# Altium PCB menb_HV_v1.0 - Cu.PcbDoc (part 2 of 3)
Units mil, origin at the board's own origin, x right, y up, seen from the top; angles counter-clockwise.
Board outline 6102.36 x 4921.26 mil, 2 copper layers (Top Layer, Bottom Layer); 139 components, 224 nets, 601 pads, 106 vias.
Unrouted connection lines stored in the file: 1.
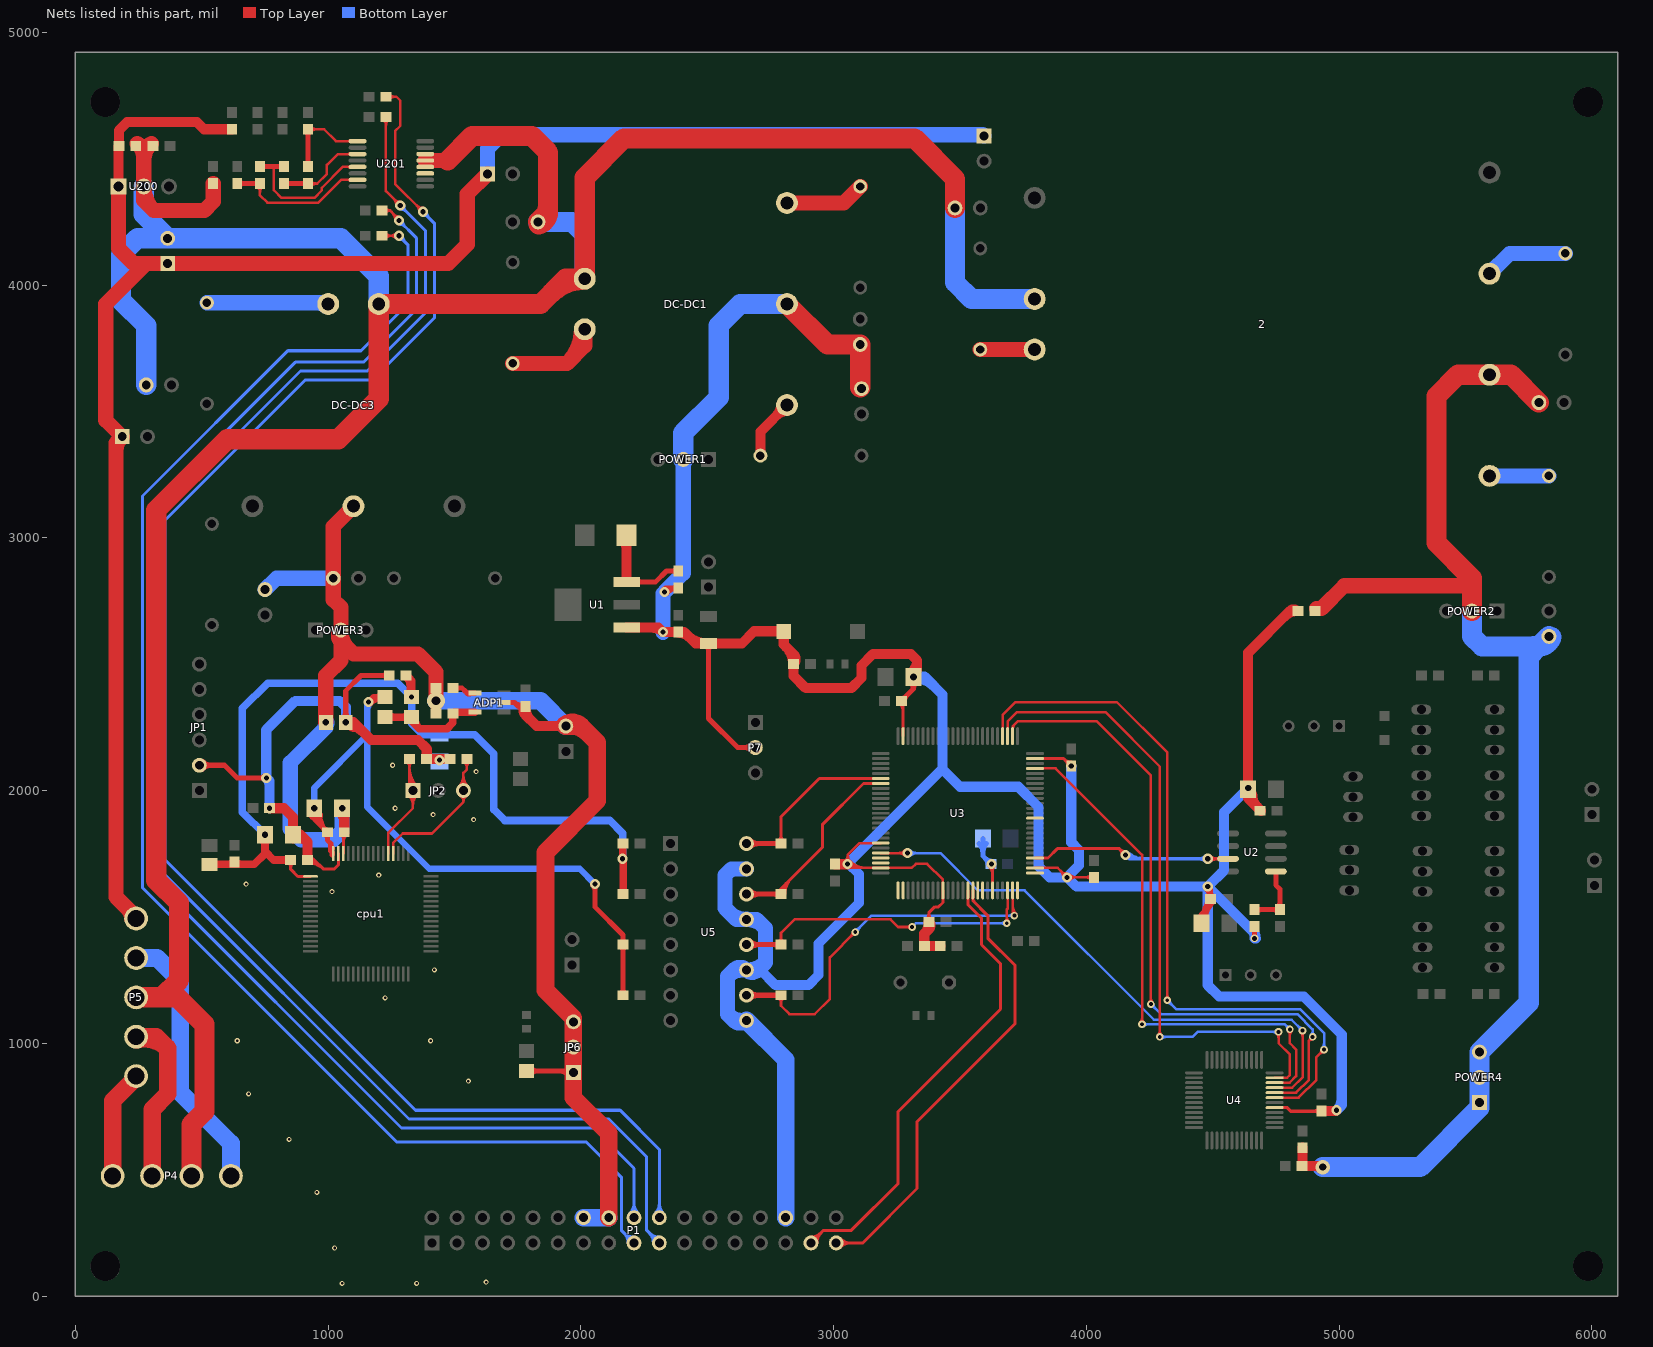
[diagram p2: the nets of this part, all layers, seen from the top]

## Via types
v1: diameter 40, hole 20, Top Layer to Bottom Layer, tented both sides, 48 vias
v2: diameter 20, hole 10, Top Layer to Bottom Layer, tented both sides, 20 vias
v3: diameter 30, hole 15, Top Layer to Bottom Layer, tented both sides, 20 vias
v4: diameter 50, hole 25, Top Layer to Bottom Layer, 5 vias
v5: diameter 50, hole 25, Top Layer to Bottom Layer, tented both sides, 4 vias
v6: diameter 40, hole 20, Top Layer to Bottom Layer, 2 vias
v7: diameter 50, hole 28, Top Layer to Bottom Layer, 1 vias
v8: diameter 30, hole 20, Top Layer to Bottom Layer, tented both sides, 1 vias
v9: diameter 31, hole 15, Top Layer to Bottom Layer, tented both sides, 1 vias
v10: diameter 70, hole 35, Top Layer to Bottom Layer, tented both sides, 1 vias
v11: diameter 60, hole 30, Top Layer to Bottom Layer, tented both sides, 1 vias
v12: diameter 58, hole 28, Top Layer to Bottom Layer, 1 vias
v13: diameter 60, hole 30, Top Layer to Bottom Layer, 1 vias

## Nets (pads, with @x,y where several pads share a name; then routed paths per layer and width w, separated by ;. In a path a pad name is that pad's centre, name@x,y a point inside that pad or via, vN(x,y) a via of type N, cw(c..) or ccw(c..) an arc to the next point about the centre after c; other vN are vias at no path point) (continued)
A3V3: C12.2 C13.2 cpu1.64 R3.1 R8.1 R19.1 | length 3492.1
  Top Layer w20: C12.2@926.52,1928.36 ccw(c968.94,1923.05) 938.71,1892.82 ; C12.2@929.14,1909.38 cw(c952.93,1912.66) C12.2@943.06,1934.56 ; C12.2@933.24,1907.99 cw(c919.51,1886.66) 944.88,1886.66 ; C12.2@934.51,1919.39 cw(c909.48,1894.36) 944.88,1894.36 ; C12.2@936.06,1918.04 cw(c912.82,1887.34) 950.96,1892.61 ; 944.88,1893.22 cw(c981.9,1893.22) C12.2@955.72,1919.39 ; C12.2@944.88,1930 944.88,1886.65 ; C12.2@946.37,1925.88 ccw(c1020.33,1916.62) 967.62,1863.91 ; C12.2@948.14,1933.99 cw(c914.22,1889.2) C12.2@969.87,1896.89 ; C12.2@950.52,1895.83 cw(c984.12,1900.47) C12.2@957.08,1920.94 ; C12.2@956.52,1907.99 ccw(c970.26,1886.66) 944.88,1886.66 ; C12.2@966.21,1923.39 ccw(c1071.72,1910.19) C13.2@996.54,1835 ; 976.64,1854.89 cw(c956.75,1835) C13.2@984.88,1835 ; C13.2@981.39,1850.14 ccw(c994.57,1863.31) C13.2@994.57,1844.68 ; C13.2@989.69,1828.15 cw(c973.15,1811.62) 996.54,1811.62 cw(c1019.92,1811.62) C13.2@1003.38,1828.15 ; 1015,1745 1015,1756.1 1010,1761.1 1010,1790 996.54,1803.46 C13.2@996.54,1835 ; 1015,1749.41 cw(c1021.69,1749.41) cpu1.64@1016.96,1754.14 ; 1015,1751.69 ccw(c1021.69,1751.69) cpu1.64@1016.96,1746.96 ; v1@2047.93,1622.93 cw(c2030.86,1605.86) 2055,1605.86 cw(c2079.14,1605.86) v1@2062.07,1622.93 ; v1(2055,1630) 2055,1540 2166.54,1428.46 R8.1@2166.54,1390 R19.1@2166.54,1190 ; R19.1@2159.69,1196.85 ccw(c2143.15,1213.38) 2166.54,1213.38 ccw(c2189.92,1213.38) R19.1@2173.38,1196.85 ; R8.1@2159.69,1383.15 cw(c2143.15,1366.62) 2166.54,1366.62 cw(c2189.92,1366.62) R8.1@2173.38,1383.15 ; R8.1@2159.69,1396.85 ccw(c2143.15,1413.38) 2166.54,1413.38 ccw(c2189.92,1413.38) R8.1@2173.38,1396.85 ; 944.88,1886.65 C13.2@996.54,1835 ; 1010,1788.37 ccw(c1033.76,1788.37) 1016.96,1771.57 cw(c1033.76,1788.37) 1010,1788.37
  Top Layer w25: v1(1160,2350) 1179.37,2369.37 R3.1@1225,2369.37 ; v1@1165.3,2344.7 cw(c1224.87,2285.13) R3.1@1224.87,2369.37 ; R3.1@1212.38,2358.72 ccw(c1186.68,2333.01) 1186.68,2369.37 ccw(c1186.68,2405.73) R3.1@1212.38,2380.02
  Bottom Layer w25: v5@936.28,1938.84 ccw(c914.94,1960.18) 945.12,1960.18 ccw(c975.3,1960.18) v5@953.96,1938.84 ; v5(945.12,1930) 945.12,2010.12 1155,2220 ; 1155,2319.82 cw(c1190.18,2319.82) v1@1165.3,2344.7 ; v1@1155,2340 1155,2220 ; v1(2055,1630) 1995,1690 1400,1690 1155,1935 1155,2220
AD1: P1.31 U3.15 | length 1912.9
  Top Layer w12: P1.31@2910,210 2960,260 3070,260 3255,445 3255,730 3660,1135 3660,1315 3585,1390 3585,1495 3530.59,1549.41 U3.15@3530.59,1605 ; P1.31@2910,233.53 ccw(c2910,290.33) 2950.16,250.16 ccw(c2990.33,210) P1.31@2933.53,210
AD2: P1.33 U3.16 | length 1928.7
  Top Layer w12: P1.33@3010,210 3115,210 3330,425 3330,690 3718,1078 3718,1307.46 3610,1415.46 3610,1505 3550.27,1564.72 U3.16@3550.27,1605 ; P1.33@3026.64,193.36 cw(c3066.8,153.2) 3066.8,210 cw(c3066.8,266.8) P1.33@3026.64,226.64 ; U3.16@3550.18,1575.47 ccw(c3575.9,1575.47) 3557.71,1557.29
AD3: U3.17
AD4: U3.18
AGND: C31.1 C32.2 U3.20 | length 415
  Top Layer w12: v1@3615.1,1700.1 cw(c3581.51,1666.51) 3629.01,1666.51 ; U3.20@3629.02,1605 v1@3629.02,1710 ; 3629.01,1685.89 cw(c3649.11,1685.89) v1@3634.9,1700.1
  Bottom Layer w20: C32.2@3574.72,1790.86 cw(c3538.03,1754.17) 3589.92,1754.17 cw(c3641.82,1754.17) C32.2@3605.12,1790.86 ; C32.2@3589.92,1810 3589.92,1741.61 C31.1@3621.54,1710 ; 3601.64,1729.89 cw(c3581.75,1710) C31.1@3609.88,1710 ; C31.1@3602.01,1729.52 ccw(c3625,1752.51) C31.1@3625,1720 ; C31.1@3606.39,1725.14 ccw(c3619.57,1738.31) C31.1@3619.57,1719.68
  other v1: 3625,1710
BOOT1: U3.37
D3V3: C7.2 C8.2 C9.2 C10.2 cpu1.1 DS1.2 R1.2 R4.1 R23.1 R24.1 | length 3919.3
  Top Layer w12: C9.2@841.86,1715.32 cw(c818.5,1691.96) 851.54,1691.96 cw(c884.57,1691.96) C9.2@861.21,1715.32 ; C9.2@851.54,1725 851.54,1688.46 880,1660 cpu1.1@930,1660
  Top Layer w20: v1(2165,1730) v1@2166.54,1728.46
  Top Layer w30: DS1.2@530,1707.6 707.6,1707.6 749.88,1749.88 749.88,1760.12 ; 601.86,1707.6 ccw(c601.86,1742.7) R1.2@626.69,1717.88 ; R1.2@633.31,1717.88 ccw(c658.14,1742.7) 658.14,1707.6 ; C7.2@738.22,1809.4 cw(c710.06,1781.24) 749.88,1781.24 cw(c789.71,1781.24) C7.2@761.55,1809.4 ; C7.2@749.88,1825 749.88,1760.12 ; C9.2@851.54,1725 785,1725 749.88,1760.12 ; C8.2@1307.12,2451.69 cw(c1251.88,2396.45) R4.1@1330,2396.45 ; C8.2@1308.46,2455 1330,2433.46 v1(1330,2370) R4.1@1330,2369.37 ; C8.2@1309.59,2450.39 cw(c1305.11,2425.9) 1330,2425.9 ; R4.1@1317.26,2375.83 ccw(c1267.58,2405.61) 1323.53,2420.6 ; R4.1@1321.12,2378.25 ccw(c1299.68,2399.69) 1330,2399.69 ccw(c1360.32,2399.69) R4.1@1338.88,2378.25 ; v1(2165,1730) R23.1@2165,1788.46 ; R24.1@2166.54,1590 v1@2166.54,1728.46
  Bottom Layer w30: v4(750,1825) 660,1915 660,2325 760,2425 1275,2425 v1(1330,2370) 1330,2265 1375,2220 1580,2220 1655,2145 1655,1925 1698.46,1881.54 2113.46,1881.54 2165,1830 v1(2165,1730) ; 1383.88,2220 ccw(c1383.88,2277.3) C10.2@1424.4,2236.78 ; C10.2@1455.6,2236.78 ccw(c1496.12,2277.3) 1496.12,2220
DAC: U2.3 U3.29 | length 1043.4
  Top Layer w12: U3.29@3796.34,1732.95 3847.95,1732.95 3885,1770 4130,1770 v1(4155,1745) ; v1@4141,1745 ccw(c4107.2,1745) 4131.1,1768.9 ccw(c4155,1792.8) v1@4155,1759
  Top Layer w15: v1(4480,1730) U2.3@4560.51,1730 ; v1@4488.84,1721.16 cw(c4510.18,1699.82) 4510.18,1730 cw(c4510.18,1760.18) v1@4488.84,1738.84
  Bottom Layer w15: v1@4153.23,1743.23 ccw(c4185.18,1775.18) 4185.18,1730 ; v1(4155,1745) 4170,1730 v1(4480,1730) ; v1@4163.84,1753.84 ccw(c4221.39,1811.39) 4221.39,1730 ; v1@4471.16,1721.16 ccw(c4449.82,1699.82) 4449.82,1730 ccw(c4449.82,1760.18) v1@4471.16,1738.84
DGND: C4.1 C5.1 C6.1 C7.1 C8.1 C9.1 C10.1 cpu1.63 JP1.2 R5.1 | length 3116.8
  Top Layer w12: C9.1@918.46,1725 945,1725 ; C9.1@919.57,1735.28 cw(c922.11,1705.19) 943.46,1726.54 ; C9.1@920.57,1723.32 cw(c924.95,1671.49) 961.73,1708.27 ; C9.1@921.58,1711.36 cw(c927.8,1637.8) 980,1690 ; C9.1@932.07,1717.8 cw(c945,1709.79) 945,1725 ; C9.1@932.07,1732.2 ccw(c945,1740.21) 945,1725 ; cpu1.63@1040.24,1750.55 1040.24,1705.24 1025,1690 980,1690 ; 945,1725 980,1690
  Top Layer w20: JP1.2@490,2100 590,2100 640,2050 v1(755,2050) ; JP1.2@503.81,2086.19 cw(c537.14,2052.86) 537.14,2100 cw(c537.14,2147.14) JP1.2@503.81,2113.81 ; v1@747.93,2042.93 ccw(c730.86,2025.86) 730.86,2050 ccw(c730.86,2074.14) v1@747.93,2057.07 ; R5.1@1056.95,2284.38 ccw(c1026.98,2314.36) 1069.37,2314.36 ccw(c1111.76,2314.36) R5.1@1081.79,2284.38 ; R5.1@1059.39,2280.61 ccw(c1035.31,2304.69) 1069.37,2304.69 ; R5.1@1060.6,2281.69 ccw(c1045.87,2300) 1069.37,2300 ; R5.1@1061.71,2287.77 ccw(c1055.78,2300) 1069.37,2300 ; 1069.37,2307.73 ccw(c1107.73,2307.73) R5.1@1080.61,2280.61 ; R5.1@1077.03,2287.77 cw(c1082.96,2300) 1069.37,2300 ; R5.1@1078.59,2282.29 cw(c1090.97,2300) 1069.37,2300 ; C8.1@1232.72,2448.15 ccw(c1216.19,2431.62) 1216.19,2455 ccw(c1216.19,2478.38) C8.1@1232.72,2461.85 ; C8.1@1241.54,2455 1130,2455 1069.37,2394.37 1069.37,2300
  Top Layer w40: v1(768.46,1930) 825,1930 860.12,1894.88 C7.1@860.12,1825 890,1825 918.46,1796.54 ; C7.1@863.53,1810.09 cw(c879.79,1757.86) 918.46,1796.54 ; C9.1@918.46,1725 918.46,1796.54 ; R5.1@1065,2270 1100,2270 1170,2200 1355,2200 1390,2165 C5.1@1390,2125 ; R5.1@1069.37,2260.47 cw(c1069.37,2163.52) 1137.92,2232.08 ; R5.1@1070,2265 cw(c1070,2180.5) 1129.75,2240.25 ; R5.1@1074.33,2272.5 ccw(c1112.48,2294.52) 1101.08,2251.98 ; C5.1@1388.46,2125 C6.1@1481.54,2125
  Bottom Layer w40: v1(768.46,1930) 768.46,2036.54 v1(755,2050) ; 768.46,2017.49 ccw(c722.49,2017.49) v1(755,2050) ; v5(1070,2270) 1070,2330 1045,2355 870,2355 755,2240 v1(755,2050)
  other v2: 1055,50 1350,50 1625,55 1025,190 955,410 845,620 685,800 1555,850 640,1010 1405,1010 1225,1180 1420,1290 1015,1600 675,1630 1200,1665 1575,1885 1415,1905 1265,1930 1585,2075 1255,2100
  other v6: 1440,2120
E1_AMP: R21.2 U3.81 U5.16 | length 863
  Top Layer w12: R21.2@2781.86,1799.68 ccw(c2758.5,1823.04) 2791.54,1823.04 ccw(c2824.57,1823.04) R21.2@2801.21,1799.68 ; R21.2@2791.54,1790 2791.54,1896.54 2942.91,2047.91 U3.81@3186.1,2047.91
  Top Layer w20: U5.16@2655,1790 R21.2@2791.54,1790 ; U5.16@2668.81,1776.19 cw(c2702.14,1742.86) 2702.14,1790 cw(c2702.14,1837.14) U5.16@2668.81,1803.81 ; R21.2@2782.72,1783.15 ccw(c2766.19,1766.62) 2766.19,1790 ccw(c2766.19,1813.38) R21.2@2782.72,1796.85
E2_AMP: R22.1 U3.82 U5.14 | length 1054.9
  Top Layer w12: R22.1@2783.19,1590 cw(c2815.03,1590) 2792.51,1612.51 ; R22.1@2785.72,1602.39 ccw(c2781.43,1611.53) 2791.54,1611.53 ; R22.1@2791.54,1590 2791.54,1611.54 ; R22.1@2795.19,1590 cw(c2856,1590) 2813,1633 ; R22.1@2797.35,1602.39 cw(c2801.64,1611.53) 2791.54,1611.53 ; R22.1@2807.19,1590 cw(c2896.97,1590) 2833.49,1653.49 ; U3.82@3186.1,2028.23 3118.23,2028.23 2955,1865 2955,1775 2791.54,1611.54
  Top Layer w20: U5.14@2655,1590 R22.1@2791.54,1590 ; U5.14@2668.81,1576.19 cw(c2702.14,1542.86) 2702.14,1590 cw(c2702.14,1637.14) U5.14@2668.81,1603.81 ; R22.1@2782.72,1583.15 ccw(c2766.19,1566.62) 2766.19,1590 ccw(c2766.19,1613.38) R22.1@2782.72,1596.85
GND: 2.1 C200.1 C201.1 DC12V_IN.2 DC-DC1.2 DC-DC3.2 P4.2 P5.3 P_C1.2 P_C5.2 P_C7.2 R212.1 U200.2 U201.11 U201.12 U201.13 U201.14 | length 12448.1
  Top Layer w60: C200.1@244.64,4559.42 cw(c227.19,4520.33) 270,4520.33 ; C200.1@247.73,4557.29 cw(c193.95,4503.52) 270,4503.52 ; 270,4491.45 cw(c363.12,4491.45) C201.1@297.27,4557.29 ; 270,4515.34 cw(c317.2,4515.34) C201.1@301.03,4559.69 ; 270,4547.5 U200.2@270,4390 270,4335 310,4295 ; U200.2@271.5,4389.98 ccw(c402.98,4387.99) 310,4295 ; R212.1@545,4401.54 545,4330 510,4295 310,4295 ; U201.13@1383.86,4492.8 1472.8,4492.8
  Top Layer w80: P5.3@245,1181.81 341.81,1181.81 ; P4.2@459.09,475 459.09,679.09 510,730 510,1075 403.19,1181.81 341.81,1181.81 ; 1472.8,4492.8 1570,4590 1805,4590 1870,4525 1870,4290 ; P_C1.2@1830,4250 1870,4290 ; P_C1.2@1833.08,4239.99 ccw(c1817.67,4290) 1870,4290 ; P_C1.2@1837.41,4242.59 ccw(c1758.71,4321.29) 1870,4321.29 ; 1881.32,3966.32 cw(c2015,3832.64) DC-DC1.2@2015,4021.69 ; P_C5.2@3480,4305 3480,4420 3320,4580 2170,4580 2015,4425 DC-DC1.2@2015,4025 1940,4025 1840,3925 DC-DC3.2@1200,3925 1200,3550 1040,3390 600,3390 320,3110 320,1645 410,1555 410,1250 341.81,1181.81
  Bottom Layer w80: U200.2@270,4390 270,4280 DC12V_IN.2@365,4185 ; P_C7.2@280,3605 280,3840 180,3940 180,4120 245,4185 DC12V_IN.2@365,4185 ; DC-DC3.2@1200,3925 1200,4035 1050,4185 DC12V_IN.2@365,4185 ; P_C1.2@1830,4250 1965,4250 2015,4200 DC-DC1.2@2015,4025 ; P_C5.2@3480,4305 3480,4010 3545,3945 2.1@3795,3945
GND5V1: ADP1.2 C1.2 C2.2 C3.2 C12.1 C13.1 cpu1.62 DC-DC3.4 JP6.1 JP6.2 JP6.3 LED10.2 P1.14 P1.16 P2.2 P_C8.2 P_C9.1 POWER3.2 R5.2 | length 7110.4
  Top Layer w12: C13.1@1051.82,1825.32 cw(c1032.26,1805.76) 1059.92,1805.76 ; v5(1055.12,1930) C12.1@1063.46,1921.65 ; cpu1.62@1059.92,1750.55 C13.1@1059.92,1835 ; 1059.92,1798.16 cw(c1098.34,1798.16) C13.1@1071.17,1825.32
  Top Layer w20: v10@1411.6,2334.95 cw(c1389.43,2305.2) C2.2@1426.54,2305.2 ; C2.2@1419.69,2312.05 ccw(c1403.15,2328.58) 1426.54,2328.58 ccw(c1449.92,2328.58) C2.2@1433.38,2312.05 ; v10(1426.54,2355) C2.2@1426.54,2305.2 ; v10@1441.47,2334.95 ccw(c1463.64,2305.2) C2.2@1426.54,2305.2 ; ADP1.2@1695,2347.6 1737.4,2347.6 ; 1756.25,2328.75 ccw(c1773.33,2345.84) C1.2@1784.97,2324.66 ; C1.2@1773.15,2324.88 ccw(c1756.62,2308.35) 1756.62,2331.73 ccw(c1756.62,2355.11) C1.2@1773.15,2338.58 ; C1.2@1775.34,2342.19 cw(c1759.97,2370.17) 1737.4,2347.6 ; C1.2@1780,2331.73 1753.27,2331.73 1737.4,2347.6 ; LED10.2@1785,890.63 1954.37,890.63 1970,875 JP6.1@1970,885 ; LED10.2@1799.38,878.21 cw(c1829.36,848.24) 1829.36,890.63 cw(c1829.36,933.02) LED10.2@1799.38,903.05 ; 1909.26,890.63 cw(c1909.26,824.26) JP6.1@1956.19,871.19 ; 1936.45,890.63 ccw(c1936.45,918.55) JP6.1@1956.19,898.81
  Top Layer w40: C12.1@1046.99,1917.93 cw(c1007.21,1878.16) 1063.46,1878.16 ; C12.1@1051.58,1926.46 cw(c1022.9,1897.78) C12.1@1063.46,1897.78 ; C12.1@1057.77,1899.26 cw(c1079.99,1912.08) C12.1@1059.18,1927.08 ; C13.1@1063.46,1835 C12.1@1063.46,1921.65 ; C1.2@1779.69,2329.76 ccw(c1850.78,2329.76) 1800.51,2279.49 ; C1.2@1779.77,2329.98 ccw(c1795.11,2315.11) 1780,2300 ; C1.2@1780,2331.73 1780,2300 ; P2.2@1940,2255 1825,2255 1780,2300
  Top Layer w60: v5(990,2270) 990,2455 1050,2515 1050,2590 ; POWER3.2@1049.53,2635 ccw(c1157.03,2635) 1081.01,2558.99 ; POWER3.2@1049.66,2635.33 ccw(c1072.84,2612.84) 1050,2590 ; DC-DC3.4@1100,3125 1020,3045 P_C9.1@1020,2840 1020,2755 1050,2725 POWER3.2@1050,2635 1050,2590 ; v10(1426.54,2355) 1426.54,2468.46 1355,2540 1100,2540 1050,2590
  Top Layer w70: P2.2@1936.7,2259.36 cw(c1965.84,2220.85) 2000,2255 ; P2.2@1940,2255 2000,2255 ; P2.2@1940,2260.47 cw(c1940,2128.83) 2033.08,2221.92 ; P1.16@2110,310 2110,645 1970,785 1970,1100 1860,1210 1860,1755 2065,1960 2065,2190 2000,2255
  Bottom Layer w60: P_C8.2@750,2795 795,2840 P_C9.1@1020,2840 ; 984.39,2244.39 ccw(c958.79,2270) v5@995,2270 ; v5(990,2270) 990,2250 850,2110 850,1848.46 893.46,1805 1020,1805 1055.12,1840.12 v5(1055.12,1930)
  Bottom Layer w70: v10(1426.54,2355) 1840,2355 P2.2@1940,2255 ; P1.14@2010,310 P1.16@2110,310
GND5V2: C11.1 C19.1 C20.2 C21.2 C22.2 C23.1 C24.1 C25.1 C26.2 C27.2 C30.2 C33.1 C34.2 C35.2 C36.2 C37.2 C38.2 C39.2 DC-DC1.4 P1.30 P7.2 P_C2.2 P_C3.1 POWER1.2 R20.1 S1.4 U1.1 U3.10 U3.27 U3.49 U3.74 U3.94 U3.99 U4.17 U5.9 U5.11 U5.13 U5.15 | length 17945.9
  Top Layer w10: v1@3045.1,1721.27 ccw(c3022.91,1746.53) 3056.54,1746.53 ; v1@3051.46,1706.46 ccw(c3082.56,1737.56) 3082.56,1693.58 ; 3056.54,1742.51 ccw(c3087.51,1742.51) 3065.61,1720.61 ccw(c3130.85,1785.85) 3130.85,1693.58 ; v1@3058.54,1713.54 ccw(c3106.71,1761.71) 3106.71,1693.58 ; v1@3060.31,1695.97 cw(c3064.02,1686.18) 3071.42,1693.58 ; v1@3069.03,1704.69 ccw(c3078.82,1700.98) 3071.42,1693.58 ; U3.94@3186.1,1792.01 3102.01,1792.01 3056.54,1746.54 ; U3.10@3432.16,1605 3432.16,1647.84 3370,1710 3325,1710 3308.58,1693.58 U3.99@3186.1,1693.58 3071.42,1693.58 ; U3.27@3796.34,1693.58 3886.42,1693.58 v1(3923.46,1656.54) C36.2@4030,1656.54 ; v1@3908.46,1656.54 ccw(c3872.25,1656.54) 3897.86,1682.14 ccw(c3923.46,1707.75) v1@3923.46,1671.54 ; v1@3934.07,1645.93 cw(c3959.68,1620.32) 3959.68,1656.54 cw(c3959.68,1692.75) v1@3934.07,1667.14 ; C36.2@4019.62,1646.15 ccw(c3994.55,1621.08) 3994.55,1656.54 ccw(c3994.55,1691.99) C36.2@4019.62,1666.92 ; 3056.54,1746.54 3056.54,1708.46 3071.42,1693.58
  Top Layer w12: C38.2@3260.76,2345.32 cw(c3227.13,2311.7) 3274.69,2311.7 ; U3.74@3274.69,2215.24 C38.2@3274.69,2355 ; 3274.69,2332.23 cw(c3293.21,2332.23) C38.2@3280.11,2345.32 ; C35.2@3366.86,1489.68 ccw(c3343.5,1513.04) 3376.54,1513.04 ccw(c3409.57,1513.04) C35.2@3386.21,1489.68 ; C35.2@3376.54,1480 3376.54,1516.54 3400,1540 3415,1540 3432.16,1557.16 U3.10@3432.16,1605 ; U3.49@3796.34,2126.65 3909.88,2126.65 v1(3940,2096.54) ; 3913.28,2123.26 ccw(c3940,2149.98) C37.2@3940,2112.19 ; 3915.63,2118.72 cw(c3907.46,2088.2) C37.2@3938.06,2096.04 ; 3918.03,2118.51 cw(c3898.03,2098.5) C37.2@3926.32,2098.5 ; C37.2@3921.72,2115.64 ccw(c3944.54,2121.75) C37.2@3940.35,2098.5 ; C37.2@3926,2096.54 ccw(c3892.2,2096.54) 3916.1,2120.43 ccw(c3940,2144.33) C37.2@3940,2110.54
  Top Layer w13: U4.17@4744.45,745.47 4794.53,745.47 4808.46,731.54 C27.2@4930,731.54 ; C27.2@4920.68,722.21 ccw(c4898.17,699.7) 4898.17,731.54 ccw(c4898.17,763.37) C27.2@4920.68,740.86
  Top Layer w20: v1@2322.17,2791.22 cw(c2343.55,2774.23) 2343.55,2801.54 ; v1(2330,2785) 2346.54,2801.54 ; v1@2330.23,2795 ccw(c2330.74,2817.33) 2346.53,2801.53 ; v1@2337.83,2778.78 cw(c2385,2741.27) C11.1@2385,2801.54 2346.54,2801.54 ; v1@2340,2785.23 cw(c2362.33,2785.74) 2346.53,2801.53 ; C11.1@2378.15,2794.69 ccw(c2361.62,2778.15) 2361.62,2801.54 ccw(c2361.62,2824.92) C11.1@2378.15,2808.38 ; C20.2@2496.76,2573.61 cw(c2476.87,2553.72) 2505,2553.72 cw(c2533.13,2553.72) C20.2@2513.24,2573.61 ; C20.2@2505,2581.85 2505,2285 2620,2170 P7.2@2690,2170 ; P7.2@2676.19,2156.19 ccw(c2642.86,2122.86) 2642.86,2170 ccw(c2642.86,2217.14) P7.2@2676.19,2183.81 ; C38.2@3268.46,2355 3315.12,2401.65 ; C38.2@3270.43,2364.68 ccw(c3270.43,2383.31) C38.2@3283.61,2370.14 ; C38.2@3280.12,2355 cw(c3308.25,2355) 3288.36,2374.89 ; C34.2@3301.78,2429.2 cw(c3280,2401.66) 3315.12,2401.66 ; C34.2@3304.51,2439.39 cw(c3278.9,2413.79) 3315.12,2413.79 cw(c3351.33,2413.79) C34.2@3325.72,2439.39 ; v7(3315.12,2450) 3315.12,2401.65 ; C34.2@3328.45,2429.2 ccw(c3350.24,2401.66) 3315.12,2401.66 ; C23.1@4454.88,1475 4454.88,1509.88 4491.54,1546.54 ; C23.1@4455.05,1510.05 ccw(c4395.1,1570) C24.1@4479.88,1570 ; 4455.74,1511.25 ccw(c4482.44,1495.83) C23.1@4456.16,1479.72 ; C23.1@4456.32,1479.35 cw(c4498.58,1491.42) 4467.5,1522.5 ; 4472.54,1540.35 ccw(c4515.03,1515.82) C23.1@4473.21,1490.17 ; v1@4473,1612.86 cw(c4429.64,1568.69) C24.1@4491.54,1568.69 ; C23.1@4475.55,1484.84 cw(c4535.96,1502.11) 4491.53,1546.53 ; v1(4480,1620) 4491.54,1608.46 C24.1@4491.54,1570 4491.54,1546.54 ; C24.1@4484.69,1563.15 cw(c4468.15,1546.62) 4491.54,1546.62 cw(c4514.92,1546.62) C24.1@4498.38,1563.15 ; C24.1@4484.69,1576.85 ccw(c4468.15,1593.38) 4491.54,1593.38 ccw(c4514.92,1593.38) C24.1@4498.38,1576.85 ; 4489.19,1544.19 ccw(c4463.38,1570) C24.1@4499.88,1570 ; C25.1@4658.15,1452.72 cw(c4641.62,1436.19) 4665,1436.19 cw(c4688.38,1436.19) C25.1@4671.85,1452.72 ; v8(4665,1415) C25.1@4665,1461.54 ; v1@4986.54,731.54 v1(4990,735)
  Top Layer w40: U1.1@2181.14,2644.45 2307.09,2644.45 v1(2325,2626.54) ; 2281.75,2644.45 cw(c2281.75,2583.29) v1(2325,2626.54) ; C19.1@2385,2624.88 cw(c2385,2564.24) 2427.88,2607.12 ; 2422.01,2612.99 ccw(c2493.19,2684.16) C20.2@2493.19,2583.5 ; 2811.51,2568.49 cw(c2743.03,2500) C33.1@2839.88,2500 ; C33.1@2841.76,2499.78 ccw(c2822.08,2519.01) 2841.54,2538.46 ; C39.2@3005,1708.46 v1@3056.54,1708.46 ; C34.2@3307.28,2462.34 ccw(c3258.28,2514.88) 3330.12,2514.88 ; C34.2@3311.58,2453.54 ccw(c3266.83,2498.28) 3330.12,2498.28 ; C34.2@3312.57,2454.3 ccw(c3294.29,2485.12) 3330.12,2485.12 3330.12,2514.88 ; C34.2@3319.81,2451.73 cw(c3359.07,2466.25) 3323.57,2488.42 ; C35.2@3374.88,1480.03 cw(c3318.04,1473.89) 3358.47,1433.47 ; C35.2@3376.54,1480 3376.54,1451.54 ; C35.2@3376.76,1480.22 cw(c3362.08,1465.99) 3376.54,1451.54 ; C30.2@3421.54,1385 C26.2@3358.46,1385 3358.46,1433.46 ; C21.2@4637.5,2005.67 cw(c4616.65,1969.56) C21.2@4656.93,1980.35 ; C21.2@4645,2010 ccw(c4753.64,2010) C22.2@4676.82,1933.18 ; C21.2@4651.38,2001.06 ccw(c4753.84,2001.06) C22.2@4681.39,1928.61 ; C22.2@4690,1920 4640,1970 4640,2545 4805,2710 ; 4784.63,2689.63 cw(c4834.57,2639.69) R20.1@4834.57,2710.32 ; R20.1@4834.79,2710.23 ccw(c4820.01,2694.99) 4805,2710 ; R20.1@4836.54,2710 4805,2710 ; C27.2@4930,731.54 v1@4986.54,731.54 ; v1(2325,2626.54) 2408.46,2626.54 2453.15,2581.85 C20.2@2505,2581.85 2636.85,2581.85 2685,2630 S1.4@2802.28,2630 2802.28,2577.72 2841.54,2538.46 ; 2841.54,2538.46 C33.1@2841.54,2500 2841.54,2453.46 2890,2405 3070,2405 3110,2445 3110,2495 3155,2540 3305,2540 3330.12,2514.88 ; 3358.46,1433.46 3376.54,1451.54
  Top Layer w80: DC-DC1.4@2815,3925 2975,3765 P_C3.1@3105,3765 P_C2.2@3105,3595
  Bottom Layer w20: v1@2325,2780 v1(2330,2785) ; 2700,1290 2710,1290 ; v1(3055,1710) v1@3060,1710
  Bottom Layer w40: 2710,1290 2770,1230 2900,1230 2940,1270 2940,1395 3100,1555 3100,1670 v1@3060,1710 ; v1(3055,1710) 3430,2085 ; v7@3315.12,2445 cw(c3315.12,2324.57) 3400.27,2409.73 ; v7(3315.12,2450) 3360,2450 3430,2380 3430,2085 ; v1(3940,2096.54) 3940,1795 3970,1765 3970,1703.07 v1(3923.46,1656.54) ; v4(4640,2010) 4545,1915 4545,1685 v1(4480,1620) ; 4659.39,1440.61 cw(c4633.79,1415) v8@4670,1415 ; v8(4665,1415) 4665,1435 v1(4480,1620) ; 5010,783.28 cw(c4941.72,783.28) v1(4990,735) 5010,755 5010,1035 4860,1185 4525,1185 4480,1230 v1(4480,1620) ; 3430,2085 3500,2015 3730,2015 3810,1935 3810,1700 3853.46,1656.54 v1(3923.46,1656.54) ; v1(3923.46,1656.54) 3960,1620 v1(4480,1620)
  Bottom Layer w60: v1(2325,2626.54) v1@2325,2780 ; v1(2330,2785) 2405,2860 POWER1.2@2405,3310 ; 2587.52,1517.48 ccw(c2655,1584.96) U5.13@2655,1489.53 ; U5.11@2654.67,1289.66 ccw(c2677.16,1312.84) 2700,1290 ; U5.9@2655,1090 2605,1090 ; U5.11@2654.99,1289.53 ccw(c2656.41,1393.58) 2730,1320 ; U5.13@2655,1490.47 cw(c2655,1395.04) 2722.48,1462.52 ; U5.15@2655,1690 2595,1690 2570,1665 2570,1535 2615,1490 2695,1490 2730,1455 2730,1320 ; U5.9@2655.06,1089.53 cw(c2643.34,1178.34) 2580,1115 ; U5.11@2655.06,1290.47 ccw(c2643.34,1201.66) 2580,1265 ; U5.9@2655.33,1089.66 cw(c2630.34,1115.33) 2605,1090 ; U5.11@2655.33,1290.34 ccw(c2630.34,1264.67) 2605,1290 ; 2580,1115 2605,1090 ; 2580,1115 2580,1265 ; 2580,1265 2605,1290 ; 2605,1290 U5.11@2655,1290 2700,1290 ; 2700,1290 2730,1320
  Bottom Layer w70: U5.9@2655,1090 2810,935 P1.30@2810,310
  Bottom Layer w80: POWER1.2@2405,3310 2405,3415 2545,3555 2545,3840 2630,3925 DC-DC1.4@2815,3925
GND60V: 2.4 C28.2 C29.2 P_C4.2 P_C6.1 POWER2.2 POWER4.1 POWER4.2 POWER4.3 R20.2 | length 5480
  Top Layer w40: C29.2@4853.46,515 C29.2@4855,515 ; C28.2@4855,586.54 C29.2@4855,515 ; 4901.2,515 cw(c4901.2,476.2) v12@4928.64,503.64 ; v12(4935,510) 4930,515 C29.2@4855,515 ; 5485,2810 5525,2770
  Top Layer w60: R20.2@4910,2720 4930,2720 5020,2810 5485,2810
  Top Layer w80: POWER2.2@5525,2710 5525,2770 5525,2840 5385,2980 5385,3560 5470,3645 2.4@5595,3645 5680,3645 P_C6.1@5790,3535
  Bottom Layer w80: v12(4935,510) 5320,510 5555,745 POWER4.1@5555,765 POWER4.2@5555,865 POWER4.3@5555,965 5750,1160 5750,2530 5790,2570 ; POWER2.2@5525,2710 5525,2610 5565,2570 5790,2570 ; 5758.71,2570 ccw(c5758.71,2681.29) P_C4.2@5837.41,2602.59 ; P_C4.2@5830,2610 5790,2570 ; P_C4.2@5840.01,2606.92 cw(c5790,2622.33) 5790,2570
IN1: R205.1 R208.2 U201.1 | length 507.4
  Top Layer w10: R205.1@920,4616.54 983.46,4616.54 1030.43,4569.57 U201.1@1116.14,4569.57 ; R205.1@930.38,4606.15 cw(c955.45,4581.08) 955.45,4616.54 cw(c955.45,4651.99) R205.1@930.38,4626.92 ; U201.1@1086.84,4566.84 ccw(c1080.25,4560.25) 1080.25,4569.57 ccw(c1080.25,4578.88) U201.1@1086.84,4572.3
  Top Layer w20: R208.2@913.15,4477.28 ccw(c896.62,4493.81) 920,4493.81 ccw(c943.38,4493.81) R208.2@926.85,4477.28 ; R205.1@913.15,4607.72 cw(c896.62,4591.19) 920,4591.19 cw(c943.38,4591.19) R205.1@926.85,4607.72 ; R208.2@920,4468.46 R205.1@920,4616.54
IN2: R208.1 R209.2 U201.3 | length 503.8
  Top Layer w10: R208.1@920,4401.54 956.54,4401.54 995,4440 995,4475 1038.39,4518.39 U201.3@1116.14,4518.39 ; R208.1@930.38,4391.15 cw(c955.45,4366.08) 955.45,4401.54 cw(c955.45,4436.99) R208.1@930.38,4411.92 ; U201.3@1086.84,4515.66 ccw(c1080.25,4509.07) 1080.25,4518.39 ccw(c1080.25,4527.7) U201.3@1086.84,4521.11
  Top Layer w20: R209.2@825,4401.54 R208.1@920,4401.54 ; R209.2@831.85,4394.69 cw(c848.38,4378.15) 848.38,4401.54 cw(c848.38,4424.92) R209.2@831.85,4408.38 ; R208.1@913.15,4394.69 ccw(c896.62,4378.15) 896.62,4401.54 ccw(c896.62,4424.92) R208.1@913.15,4408.38
IN3: R209.1 R210.2 U201.5 | length 676.6
  Top Layer w10: 785,4468.46 785,4375 815,4345 945,4345 975,4375 975,4385 1057.2,4467.2 U201.5@1116.14,4467.2 ; U201.5@1086.84,4464.48 ccw(c1080.25,4457.89) 1080.25,4467.2 ccw(c1080.25,4476.52) U201.5@1086.84,4469.93
  Top Layer w20: R210.2@730,4468.46 785,4468.46 R209.1@825,4468.46 ; R210.2@736.85,4461.62 cw(c753.38,4445.08) 753.38,4468.46 cw(c753.38,4491.85) R210.2@736.85,4475.31 ; R209.1@818.15,4461.62 ccw(c801.62,4445.08) 801.62,4468.46 ccw(c801.62,4491.85) R209.1@818.15,4475.31
IN4: R210.1 R211.2 U201.7 | length 715.8
  Top Layer w10: R210.1@719.62,4389.18 cw(c694.55,4364.11) 730,4364.11 cw(c765.45,4364.11) R210.1@740.38,4389.18 ; R210.1@730,4401.54 730,4355 759,4326 961,4326 1051.02,4416.02 U201.7@1116.14,4416.02 ; U201.7@1086.84,4413.3 ccw(c1080.25,4406.71) 1080.25,4416.02 ccw(c1080.25,4425.34) U201.7@1086.84,4418.75
  Top Layer w20: R211.2@640,4401.54 R210.1@730,4401.54 ; R211.2@646.85,4394.69 cw(c663.38,4378.15) 663.38,4401.54 cw(c663.38,4424.92) R211.2@646.85,4408.38 ; R210.1@723.15,4394.69 ccw(c706.62,4378.15) 706.62,4401.54 ccw(c706.62,4424.92) R210.1@723.15,4408.38
IN_+12V: C200.2 DC12V_IN.1 P5.5 P_F1.1 P_F2.1 P_F3.1 R200.2 U200.1 | length 7616.5
  Top Layer w40: U200.1@170,4390 C200.2@170,4548.46 ; C200.2@171.54,4550 171.54,4611.54 205,4645 480,4645 508.46,4616.54 R200.2@620,4616.54
  Top Layer w60: 160,3340.79 cw(c244.21,3340.79) P_F3.1@184.67,3400.33 ; U200.1@170,4390 170,4145 230,4085 280,4085 ; 207.03,1531.6 cw(c169.05,1493.62) P5.5@222.76,1493.62 ; P5.5@245,1493.62 160,1578.62 160,3375 P_F3.1@185,3400 120,3465 120,3925 280,4085 ; P_F1.1@1630,4440 1550,4360 1550,4160 1475,4085 DC12V_IN.1@365,4085 280,4085
  Bottom Layer w60: P_F1.1@1630,4440 1630,4540 1685,4595 3590,4595 P_F2.1@3595,4590
INPUT_IN1: R2.2 U3.23 U5.12 | length 1523.8
  Top Layer w10: R2.2@2781.15,1400.38 ccw(c2756.08,1425.45) 2791.54,1425.45 ccw(c2826.99,1425.45) R2.2@2801.92,1400.38 ; R2.2@2791.54,1390 2791.54,1436.54 2845,1490 3225,1490 3255,1460 v3(3310,1460) ; v3@3302.93,1452.93 ccw(c3285.86,1435.86) 3285.86,1460 ccw(c3285.86,1484.14) v3@3302.93,1467.07 ; v3@3677.93,1482.07 ccw(c3660.86,1499.14) 3685,1499.14 ccw(c3709.14,1499.14) v3@3692.07,1482.07 ; v3(3685,1475) 3685,1530 3688.07,1533.07 U3.23@3688.07,1605
  Top Layer w20: U5.12@2660,1390 R2.2@2791.54,1390 ; U5.12@2668.81,1376.19 cw(c2702.14,1342.86) 2702.14,1390 cw(c2702.14,1437.14) U5.12@2668.81,1403.81 ; R2.2@2782.72,1383.15 ccw(c2766.19,1366.62) 2766.19,1390 ccw(c2766.19,1413.38) R2.2@2782.72,1396.85
  Bottom Layer w10: v3(3310,1460) 3325,1475 v3(3685,1475) ; v3@3677.93,1467.93 ccw(c3660.86,1450.86) 3660.86,1475 ccw(c3660.86,1499.14) v3@3677.93,1482.07
INPUT_IN2: R7.1 U3.24 U5.10 | length 1804.6
  Top Layer w10: R7.1@2781.15,1179.62 cw(c2756.08,1154.55) 2791.54,1154.55 cw(c2826.99,1154.55) R7.1@2801.92,1179.62 ; R7.1@2791.54,1190 2791.54,1148.46 2825,1115 2925,1115 2985,1175 2985,1340 v3(3085,1440) ; v3@3075,1440 cw(c3050.86,1440) 3067.93,1422.93 cw(c3085,1405.86) v3@3085,1430 ; 3707.76,1522.49 ccw(c3732.49,1522.49) v3(3715,1505) 3707.76,1512.24 U3.24@3707.76,1605 ; 3707.76,1546.63 ccw(c3756.63,1546.63) v3@3722.07,1512.07
  Top Layer w20: U5.10@2660,1190 R7.1@2786.54,1190 ; U5.10@2668.81,1176.19 cw(c2702.14,1142.86) 2702.14,1190 cw(c2702.14,1237.14) U5.10@2668.81,1203.81 ; R7.1@2782.72,1183.15 ccw(c2766.19,1166.62) 2766.19,1190 ccw(c2766.19,1213.38) R7.1@2782.72,1196.85
  Bottom Layer w10: v3(3085,1440) 3150,1505 v3(3715,1505) ; v3@3085,1450 ccw(c3085,1474.14) 3102.07,1457.07 ccw(c3119.14,1440) v3@3095,1440 ; v3@3707.93,1497.93 ccw(c3690.86,1480.86) 3690.86,1505 ccw(c3690.86,1529.14) v3@3707.93,1512.07
INPUT_IN3: U3.25
INPUT_IN4: U3.26
LED1: U3.97
LED2: U3.98
LED3: U3.1
LED4: U3.2
LED_HIGH: P1.17 R207.2 | length 6170.7
  Top Layer w10: R207.2@1213.46,4195 v1(1280,4195) ; R207.2@1225.82,4184.62 cw(c1250.89,4159.55) 1250.89,4195 cw(c1250.89,4230.45) R207.2@1225.82,4205.38 ; v1@1269.39,4184.39 ccw(c1243.79,4158.79) 1243.79,4195 ccw(c1243.79,4231.21) v1@1269.39,4205.61
  Bottom Layer w12: v1@1280,4181 cw(c1280,4147.2) 1303.9,4171.1 cw(c1327.8,4195) v1@1294,4195 ; v1(1280,4195) 1315,4160 1315,3925 1130,3740 840,3740 265,3165 265,1615 1270,610 2020,610 2160,470 2160,260 P1.17@2210,210 ; P1.17@2186.47,210 ccw(c2129.67,210) 2169.84,250.16 ccw(c2210,290.33) P1.17@2210,233.53
LED_LOW: P1.20 R203.2 | length 6690.8
  Top Layer w10: R203.2@1228.46,4745 1270,4745 1285,4730 1285,4630 1265,4610 1265,4400 v1(1375,4290) ; R203.2@1240.82,4734.62 cw(c1265.89,4709.55) 1265.89,4745 cw(c1265.89,4780.45) R203.2@1240.82,4755.38 ; v1@1360,4290 ccw(c1323.79,4290) 1349.39,4315.61 ccw(c1375,4341.21) v1@1375,4305
  Bottom Layer w12: v1@1375,4276 cw(c1375,4242.2) 1398.9,4266.1 cw(c1422.8,4290) v1@1389,4290 ; v1(1375,4290) 1420,4245 1420,3870 1175,3625 910,3625 355,3070 355,1725 1345,735 2155,735 2310,580 P1.20@2310,310 ; P1.20@2293.36,326.64 ccw(c2253.2,366.8) 2310,366.8 ccw(c2366.8,366.8) P1.20@2326.64,326.64
LED_MEDIUM: P1.18 R206.2 | length 6149
  Top Layer w10: R206.2@1213.46,4295 1245,4295 ; R206.2@1227.13,4286.13 cw(c1245,4272.58) 1245,4295 ; R206.2@1227.13,4303.87 ccw(c1245,4317.42) 1245,4295 ; 1250.86,4289.14 cw(c1216.72,4255) v1@1265,4255 ; 1262.93,4277.07 ccw(c1280,4294.14) v1@1280,4270 ; 1267.93,4272.07 cw(c1250.86,4255) v1@1275,4255 ; v1(1280,4255) 1280,4260 1245,4295
  Bottom Layer w12: v1@1280,4241 cw(c1280,4207.2) 1303.9,4231.1 cw(c1327.8,4255) v1@1294,4255 ; v1(1280,4255) 1350,4185 1350,3905 1140,3695 870,3695 300,3125 300,1655 1290,665 2050,665 2210,505 P1.18@2210,310 ; P1.18@2193.36,326.64 ccw(c2153.2,366.8) 2210,366.8 ccw(c2266.8,366.8) P1.18@2226.64,326.64
LED_MEDIUMLOW: P1.19 R204.2 | length 6649.9
  Top Layer w10: R204.2@1218.08,4654.62 cw(c1193.01,4629.55) 1228.46,4629.55 cw(c1263.92,4629.55) R204.2@1238.85,4654.62 ; R204.2@1228.46,4665 1228.46,4371.54 v1(1285,4315) ; v1@1270,4315 ccw(c1233.79,4315) 1259.39,4340.61 ccw(c1285,4366.21) v1@1285,4330
  Bottom Layer w12: v1@1285,4301 cw(c1285,4267.2) 1308.9,4291.1 cw(c1332.8,4315) v1@1299,4315 ; v1(1285,4315) 1385,4215 1385,3890 1155,3660 890,3660 330,3100 330,1690 1320,700 2110,700 2260,550 2260,260 P1.19@2310,210 ; P1.19@2286.47,210 ccw(c2229.67,210) 2269.84,250.16 ccw(c2310,290.33) P1.19@2310,233.53
LI_12V: P4.1 P5.4 | length 1061.2
  Bottom Layer w70: P5.4@245,1337.72 322.28,1337.72 415,1245 415,805 615,605 P4.1@615,475
LI_CRG+: P4.3 P5.2 | length 802.1
  Top Layer w70: P5.2@242.93,1014.02 cw(c273.82,888.82) 365,980 ; P5.2@245,1025.91 319.09,1025.91 365,980 ; P4.3@303.19,475 303.19,738.19 365,800 365,980
LI_CRG-: P4.4 P5.1 | length 435.5
  Top Layer w70: P4.4@147.28,475 147.28,772.28 P5.1@245,870
MAX14803_CLK: U3.52 U4.20 | length 2793.6
  Top Layer w10: U3.52@3707.76,2215.24 3707.76,2252.76 3730,2275 4040,2275 4255,2060 v3(4255,1155) ; U3.52@3708.66,2244.76 cw(c3730.14,2244.76) 3714.95,2259.95 ; v3@4247.93,1162.07 ccw(c4230.86,1179.14) 4255,1179.14 ccw(c4279.14,1179.14) v3@4262.07,1162.07 ; U4.20@4744.45,804.53 4829.53,804.53 4880,855 4880,1010 ; v3@4885.05,1024.04 cw(c4867.63,1022.37) 4880,1010 ; v3@4894.04,1015.05 ccw(c4892.37,997.63) 4880,1010 ; v3(4895,1025) 4880,1010
  Bottom Layer w10: v3@4255,1145 cw(c4255,1120.86) 4272.07,1137.93 cw(c4289.14,1155) v3@4265,1155 ; v3(4255,1155) 4295,1115 4835,1115 4895,1055 v3(4895,1025) ; v3@4887.93,1032.07 ccw(c4870.86,1049.14) 4895,1049.14 ccw(c4919.14,1049.14) v3@4902.07,1032.07
MAX14803_CLR: U3.47 U4.22 | length 2272.1
  Top Layer w10: U3.47@3796.34,2087.28 3877.72,2087.28 4220,1745 v3(4220,1075) ; v3@4212.93,1082.07 ccw(c4195.86,1099.14) 4220,1099.14 ccw(c4244.14,1099.14) v3@4227.07,1082.07 ; U4.22@4744.45,843.9 4803.9,843.9 4830,870 4830,975 4805,1000 v3(4805,1055) ; v3@4797.93,1047.93 cw(c4780.86,1030.86) 4805,1030.86 cw(c4829.14,1030.86) v3@4812.07,1047.93
  Bottom Layer w10: v3(4220,1075) 4785,1075 v3(4805,1055) ; v3@4227.07,1067.93 cw(c4244.14,1050.86) 4244.14,1075 cw(c4244.14,1099.14) v3@4227.07,1082.07 ; v3@4795,1055 ccw(c4770.86,1055) 4787.93,1072.07 ccw(c4805,1089.14) v3@4805,1065
MAX14803_DIN: U3.54 U4.19 | length 3036.6
  Top Layer w10: U3.54@3668.39,2215.24 3668.39,2298.39 3720,2350 4120,2350 4320,2150 v3(4320,1170) ; v3@4312.93,1177.07 ccw(c4295.86,1194.14) 4320,1194.14 ccw(c4344.14,1194.14) v3@4327.07,1177.07 ; U4.19@4744.45,784.84 4839.84,784.84 4910,855 4910,945 v3(4940,975) ; v3@4930,975 cw(c4905.86,975) 4922.93,957.93 cw(c4940,940.86) v3@4940,965
  Bottom Layer w10: v3@4320,1160 cw(c4320,1135.86) 4337.07,1152.93 cw(c4354.14,1170) v3@4330,1170 ; v3(4320,1170) 4355,1135 4845,1135 4940,1040 v3(4940,975) ; v3@4932.93,982.07 ccw(c4915.86,999.14) 4940,999.14 ccw(c4964.14,999.14) v3@4947.07,982.07
MAX14803_DOUT: U3.53 U4.23 | length 2718
  Top Layer w10: U3.53@3688.07,2215.24 3688.07,2273.07 3725,2310 4075,2310 4290,2095 v3(4290,1025) ; v3@4282.93,1032.07 ccw(c4265.86,1049.14) 4290,1049.14 ccw(c4314.14,1049.14) v3@4297.07,1032.07 ; U4.23@4744.45,863.58 4793.58,863.58 4805,875 4805,955 4760,1000 v3(4760,1045) ; v3@4752.93,1037.93 cw(c4735.86,1020.86) 4760,1020.86 cw(c4784.14,1020.86) v3@4767.07,1037.93
  Bottom Layer w10: v3(4290,1025) 4420,1025 4440,1045 v3(4760,1045) ; v3@4297.07,1017.93 cw(c4314.14,1000.86) 4314.14,1025 cw(c4314.14,1049.14) v3@4297.07,1032.07 ; v3@4752.93,1037.93 ccw(c4735.86,1020.86) 4735.86,1045 ccw(c4735.86,1069.14) v3@4752.93,1052.07
MAX14803_NLE: U3.96 U4.21 | length 2462
  Top Layer w10: U3.96@3186.1,1752.64 v1(3292.64,1752.64) ; v1@3282.03,1742.03 ccw(c3256.42,1716.42) 3256.42,1752.64 ccw(c3256.42,1788.85) v1@3282.03,1763.24 ; U4.21@4744.45,824.21 4814.21,824.21 4855,865 v3(4855,1050) ; v3@4847.93,1042.93 cw(c4830.86,1025.86) 4855,1025.86 cw(c4879.14,1025.86) v3@4862.07,1042.93
  Bottom Layer w10: v1(3292.64,1752.64) 3422.36,1752.64 3570,1605 3755,1605 4267,1093 4812,1093 v3(4855,1050) ; v1@3303.24,1742.03 cw(c3328.85,1716.42) 3328.85,1752.64 cw(c3328.85,1788.85) v1@3303.24,1763.24 ; v3@4845,1050 ccw(c4820.86,1050) 4837.93,1067.07 ccw(c4855,1084.14) v3@4855,1060
Net2_2: 2.2 P_L4.2 | length 215
  Top Layer w60: P_L4.2@3580,3745 2.2@3795,3745
Net2_3: 2.3 P_L6.1 | length 333.1
  Bottom Layer w60: 2.3@5595,4045 5675,4125 P_L6.1@5895,4125
Net2_5: 2.5 P_L5.1 | length 235
  Bottom Layer w60: 2.5@5595,3245 P_L5.1@5830,3245
NetADP1_4: ADP1.4 C3.1 | length 174.3
  Top Layer w20: C3.1@1493.46,2405.2 1529.8,2405.2 1550,2385 ; C3.1@1502.28,2398.35 cw(c1518.81,2381.82) 1518.81,2405.2 cw(c1518.81,2428.58) C3.1@1502.28,2412.05 ; 1540.19,2394.81 ccw(c1564.25,2418.87) ADP1.4@1564.25,2384.84 ; ADP1.4@1564.36,2384.89 cw(c1557.24,2392.24) 1550,2385 ; ADP1.4@1580,2385 1550,2385
NetADP1_5: ADP1.5 C2.1 R3.2 R4.2 | length 574.9
  Top Layer w20: C2.1@1493.46,2305.2 C2.1@1498.46,2310.2
  Top Layer w30: R3.2@1225,2290.63 R4.2@1330,2290.63 ; R3.2@1235.85,2281.75 cw(c1257.29,2260.31) 1257.29,2290.63 cw(c1257.29,2320.95) R3.2@1235.85,2299.51 ; R4.2@1319.15,2281.75 ccw(c1297.71,2260.31) 1297.71,2290.63 ccw(c1297.71,2320.95) R4.2@1319.15,2299.51 ; R4.2@1335,2270 1360,2245 ; R4.2@1344.45,2289.25 ccw(c1398.32,2283.32) 1360,2245 ; C2.1@1493.46,2305.2 1493.46,2268.46 1470,2245 1360,2245 ; C2.1@1498.46,2310.2 ADP1.5@1580,2310.2 ; C2.1@1498.75,2301.88 cw(c1518.81,2281.82) 1518.81,2310.2
NetC5_2: C5.2 cpu1.53 JP2.1 | length 825.7
  Top Layer w10: cpu1.53@1237.09,1750.55 1237.09,1832.09 1335,1930 JP2.1@1335,2000 1321.54,2013.46 C5.2@1321.54,2125 ; C5.2@1311.15,2114.62 cw(c1286.08,2089.55) 1321.54,2089.55 cw(c1356.99,2089.55) C5.2@1331.92,2114.62 ; JP2.1@1317.66,1982.66 cw(c1275.79,1940.79) 1335,1940.79 cw(c1394.21,1940.79) JP2.1@1352.34,1982.66 ; JP2.1@1317.66,2017.34 ccw(c1308.29,2026.71) JP2.1@1321.54,2026.71 ; 1321.54,2043.44 ccw(c1378.44,2043.44) JP2.1@1338.2,2003.2 ; 1321.54,2067.58 ccw(c1402.58,2067.58) JP2.1@1345.27,2010.27 ; 1321.54,2091.72 ccw(c1426.72,2091.72) JP2.1@1352.34,2017.34 ; JP2.1@1324.73,1989.73 cw(c1299.93,1964.93) 1335,1964.93 cw(c1370.07,1964.93) JP2.1@1345.27,1989.73
NetC6_2: C6.2 cpu1.52 JP2.3 | length 824.3
  Top Layer w10: cpu1.52@1256.77,1750.55 1256.77,1791.77 1295,1830 1410,1830 1535,1955 ; JP2.3@1517.66,2017.34 ccw(c1475.79,2059.21) 1535,2059.21 ccw(c1594.21,2059.21) JP2.3@1552.34,2017.34 ; JP2.3@1521.71,1979.39 cw(c1505.99,1955) 1535,1955 ; JP2.3@1524.73,2010.27 ccw(c1499.93,2035.07) 1535,2035.07 ccw(c1570.07,2035.07) JP2.3@1545.27,2010.27 ; C6.2@1538.08,2114.62 cw(c1513.01,2089.55) 1548.46,2089.55 cw(c1583.92,2089.55) C6.2@1558.85,2114.62 ; JP2.3@1548.29,1979.39 ccw(c1564.01,1955) 1535,1955 ; C6.2@1548.46,2125 1548.46,2083.46 1535,2070 JP2.3@1535,2000 1535,1955
NetC11_2: C11.2 D1.K U1.3 | length 552.3
  Top Layer w20: U1.3@2181.14,2825.55 2295.55,2825.55 2338.46,2868.46 C11.2@2385,2868.46 ; U1.3@2221.45,2818.7 cw(c2237.99,2802.17) 2237.99,2825.55 cw(c2237.99,2848.93) U1.3@2221.45,2832.4 ; C11.2@2378.15,2861.62 ccw(c2361.62,2845.08) 2361.62,2868.46 ccw(c2361.62,2891.85) C11.2@2378.15,2875.31
  Top Layer w40: D1.K@2166.21,2993.21 cw(c2132.92,2959.92) 2180,2959.92 cw(c2227.08,2959.92) D1.K@2193.79,2993.21 ; U1.3@2180,2826.69 D1.K@2180,3010
NetC25_2: C25.2 R13.1 U2.5 | length 368.1
  Top Layer w20: C25.2@4665,1528.46 R13.1@4765,1528.46 4765,1610 4749.49,1625.51 U2.5@4749.49,1680 ; C25.2@4671.85,1521.62 cw(c4688.38,1505.08) 4688.38,1528.46 cw(c4688.38,1551.85) C25.2@4671.85,1535.31 ; R13.1@4758.15,1521.62 ccw(c4741.62,1505.08) 4741.62,1528.46 ccw(c4741.62,1551.85) R13.1@4758.15,1535.31 ; R13.1@4758.15,1537.28 ccw(c4741.62,1553.81) 4765,1553.81 ccw(c4788.38,1553.81) R13.1@4771.85,1537.28
NetDC-DC1_1: DC-DC1.1 P_L2.2 | length 527.5
  Top Layer w60: P_L2.2@1730,3690 1945,3690 2015,3760 DC-DC1.1@2015,3825 ; 1946.32,3691.32 ccw(c1812.64,3825) DC-DC1.1@2001.69,3825
NetDC-DC1_3: DC-DC1.3 P_L3.1 | length 316.9
  Top Layer w60: DC-DC1.3@2815,4325 3040,4325 P_L3.1@3105,4390
NetDC-DC1_5: DC-DC1.5 P_L1.1 | length 331.9
  Top Layer w40: P_L1.1@2710,3325 2710,3420 DC-DC1.5@2815,3525 ; DC-DC1.5@2791.69,3525 cw(c2735.42,3525) 2775.21,3485.21 cw(c2815,3445.42) DC-DC1.5@2815,3501.69
NetDC-DC3_1: DC-DC3.1 P_L7.2 | length 520.7
  Bottom Layer w40: DC-DC3.1@995,3930 DC-DC3.1@1000,3925
  Bottom Layer w60: P_L7.2@520,3930 DC-DC3.1@995,3930 ; 955.8,3930 cw(c955.8,3880.8) DC-DC3.1@990.59,3915.59